# EAGLE board CT_schematic (EAGLE 7.6.0)

Size 100 x 80 mm. Coordinates in mm from the lower left corner, seen from the top.
Outline: 0,0 100,0 100,80 0,80 0,0
Copper layers (1*16): Top 0.035mm / dielectric 1.5mm / Bottom 0.035mm
Design rules "default": minimum track width 10mil, minimum drill 24mil, track to track 8mil, track to pad 8mil, pad to pad 8mil, via to via 8mil, smd to smd 8mil, copper to edge 40mil, drill to drill 8mil, minimum pad ring 10mil, minimum via ring 8mil, stop-mask expansion 4mil, vias tented up to drill 0mil, thermal gap 10mil

## Footprints (pad centres in the part's own frame; a part is rotated, then mirrored left to right if it is on the bottom)
C0603 = smd 0.8 x 0.8: 1 -0.762,0; 2 0.762,0
C0402 = smd 0.5 x 0.5: 1 -0.508,0; 2 0.508,0
C0805 = smd 1.2 x 1.3: 1 -1.016,0; 2 1.016,0
C1206 = smd 1.3 x 1.6: 1 -1.524,0; 2 1.524,0
L0603 = smd 0.8 x 0.8: 1 -0.762,0; 2 0.762,0
DR1040 = smd 1.6 x 3.2: 1 -4.458,0; 2 4.458,0
R0603 = smd 0.8 x 0.8: 1 -0.762,0; 2 0.762,0
LQFP64 = smd 0.3 x 1.2: 1 -3.75,-5.75; 2 -3.25,-5.75; 3 -2.75,-5.75; 4 -2.25,-5.75; 5 -1.75,-5.75; 6 -1.25,-5.75; 7 -0.75,-5.75; 8 -0.25,-5.75; 9 0.25,-5.75; 10 0.75,-5.75; 11 1.25,-5.75; 12 1.75,-5.75; 13 2.25,-5.75; 14 2.75,-5.75; 15 3.25,-5.75; 16 3.75,-5.75; 33 3.75,5.75; 34 3.25,5.75; 35 2.75,5.75; 36 2.25,5.75; 37 1.75,5.75; 38 1.25,5.75; 39 0.75,5.75; 40 0.25,5.75; 41 -0.25,5.75; 42 -0.75,5.75; 43 -1.25,5.75; 44 -1.75,5.75; 45 -2.25,5.75; 46 -2.75,5.75; 47 -3.25,5.75; 48 -3.75,5.75 | smd 1.2 x 0.3: 17 5.75,-3.75; 18 5.75,-3.25; 19 5.75,-2.75; 20 5.75,-2.25; 21 5.75,-1.75; 22 5.75,-1.25; 23 5.75,-0.75; 24 5.75,-0.25; 25 5.75,0.25; 26 5.75,0.75; 27 5.75,1.25; 28 5.75,1.75; 29 5.75,2.25; 30 5.75,2.75; 31 5.75,3.25; 32 5.75,3.75; 49 -5.75,3.75; 50 -5.75,3.25; 51 -5.75,2.75; 52 -5.75,2.25; 53 -5.75,1.75; 54 -5.75,1.25; 55 -5.75,0.75; 56 -5.75,0.25; 57 -5.75,-0.25; 58 -5.75,-0.75; 59 -5.75,-1.25; 60 -5.75,-1.75; 61 -5.75,-2.25; 62 -5.75,-2.75; 63 -5.75,-3.25; 64 -5.75,-3.75
TST-110-05-T-D-RA = drill 1 pad 1.7 square: 1 0,0 | drill 1 pad 1.7: 2 0,2.54; 3 2.54,0; 4 2.54,2.54; 5 5.08,0; 6 5.08,2.54; 7 7.62,0; 8 7.62,2.54; 9 10.16,0; 10 10.16,2.54; 11 12.7,0; 12 12.7,2.54; 13 15.24,0; 14 15.24,2.54; 15 17.78,0; 16 17.78,2.54; 17 20.32,0; 18 20.32,2.54; 19 22.86,0; 20 22.86,2.54
LGA-8 = smd 0.838 x 0.559: 1 -1.003,1.875; 2 -1.003,0.625; 3 -1.003,-0.625; 4 -1.003,-1.875; 5 1.003,-1.875; 6 1.003,-0.625; 7 1.003,0.625; 8 1.003,1.875
FCI_10118193-0001LF = smd 0.4 x 1.35: 1 -1.3,2.675; 2 -0.65,2.675; 3 0,2.675; 4 0.65,2.675; 5 1.3,2.675 | smd 1.6 x 1.4: 6 -3.2,2.45; 7 3.2,2.45 | smd 1.9 x 1.9: 8 -1.2,0; 9 1.2,0 | hole 0.5: -3.3,0; 3.3,0
SOT143B = smd 1 x 0.7: 1 -0.75,-1 | smd 0.6 x 0.7: 2 0.95,-1; 3 0.95,1; 4 -0.95,1
ABS07-32.768KHZ-7-T = smd 1.1 x 2.4: 1 -2.5,0; 2 0,0
ASFL1 = smd 1.7 x 1.5: 1 -1.27,-1.1; 2 1.27,-1.1; 3 1.27,1.1; 4 -1.27,1.1
TSOT-23-5 = smd 1.3 x 0.62: 1 -1.31,0.95; 2 -1.31,0; 3 -1.31,-0.95; 4 1.31,-0.95; 5 1.31,0.95
DFN8_2X3MC = smd 0.813 x 0.305: 1 -1.398,0.75; 2 -1.398,0.25; 3 -1.398,-0.25; 4 -1.398,-0.75; 5 1.398,-0.75; 6 1.398,-0.25; 7 1.398,0.25; 8 1.398,0.75 | smd 1.753 x 1.549: 9 0,0
JST-2-SMD = smd 1 x 4.6: 1 -1,-3.7; 2 1,-3.7 | smd 1.6 x 3.4: NC1 -3.4,1.5; NC2 3.4,1.5
SON-6 = smd 0.55 x 0.3: 1 -0.355,0.5 | smd 0.52 x 0.3: 2 -0.37,0; 3 -0.37,-0.5; 4 0.37,-0.5; 5 0.37,0; 6 0.37,0.5
SW_4-1437565-2 = smd 1.4 x 2.1: 1 -2.23,4.55; 2 -2.23,-4.55; 3 2.23,4.55; 4 2.23,-4.55
LGM67K-G1J2-24-Z = smd 0.8 x 1.4: A -2,0; C 0,0
NC7SZ125M5X = smd 1.3 x 0.7: 1 -1.3,0.95; 2 -1.3,0; 3 -1.3,-0.95; 4 1.3,-0.95; 5 1.3,0.95
DUMMY_PACKAGE_135 = drill 0.3: 1 0,-1; 2 1.5,-1; 3 3,-1

## Placement (x,y rotation side)
C1  1e-07  [C0603]  -22.86,54.61 0 top  (outside the outline)
C2  1e-07  [C0603]  -26.67,54.61 0 top  (outside the outline)
C3  1e-07  [C0603]  -30.48,54.61 0 top  (outside the outline)
C4  1e-07  [C0603]  -34.29,54.61 0 top  (outside the outline)
C5  4.7e-06  [C0603]  -19.05,54.61 0 top  (outside the outline)
C6  1e-07  [C0603]  -38.1,54.61 0 top  (outside the outline)
C7  1e-08  [C0603]  -41.91,54.61 0 top  (outside the outline)
C8  1e-06  [C0603]  -45.72,54.61 0 top  (outside the outline)
C9  1e-11  [C0402]  -26.67,59.69 0 top  (outside the outline)
C10  1e-11  [C0402]  -30.48,59.69 0 top  (outside the outline)
C11  1e-07  [C0402]  -34.29,59.69 0 top  (outside the outline)
C12  1e-07  [C0402]  -38.1,59.69 0 top  (outside the outline)
C13  1e-07  [C0402]  -41.91,59.69 0 top  (outside the outline)
C14  1e-05  [C0805]  -27.94,43.18 0 top  (outside the outline)
C15  1e-07  [C0402]  -45.72,59.69 0 top  (outside the outline)
C16  1e-07  [C0402]  -49.53,59.69 0 top  (outside the outline)
C17  1e-08  [C0402]  -53.34,59.69 0 top  (outside the outline)
C18  1e-05  [C0805]  -33.02,43.18 0 top  (outside the outline)
C19  1e-05  [C0805]  -38.1,43.18 0 top  (outside the outline)
C20  1e-07  [C0402]  -57.15,59.69 0 top  (outside the outline)
C21  1e-05  [C1206]  -54.61,35.56 0 top  (outside the outline)
C22  1e-05  [C1206]  -60.96,35.56 0 top  (outside the outline)
C23  1e-08  [C0402]  -60.96,59.69 0 top  (outside the outline)
C24  1e-08  [C0402]  -15.24,64.77 0 top  (outside the outline)
F1  240.0  [L0603]  -49.53,54.61 0 top  (outside the outline)
I1  3.8e-06  [DR1040]  -57.15,6.35 0 top  (outside the outline)
R2  1000.0  [R0603]  -53.34,54.61 0 top  (outside the outline)
R4  4700.0  [R0603]  -57.15,54.61 0 top  (outside the outline)
R5  2200.0  [R0603]  -60.96,54.61 0 top  (outside the outline)
R6  2200.0  [R0603]  -15.24,59.69 0 top  (outside the outline)
R7  10000.0  [R0603]  -20.32,49.53 0 top  (outside the outline)
R8  10000.0  [R0603]  -25.4,49.53 0 top  (outside the outline)
R9  10000.0  [R0603]  -30.48,49.53 0 top  (outside the outline)
R10  10000.0  [R0603]  -35.56,49.53 0 top  (outside the outline)
R11  10000.0  [R0603]  -40.64,49.53 0 top  (outside the outline)
R12  10000.0  [R0603]  -45.72,49.53 0 top  (outside the outline)
R13  10000.0  [R0603]  -50.8,49.53 0 top  (outside the outline)
R14  220000.0  [R0603]  -55.88,43.18 0 top  (outside the outline)
R15  1000000.0  [R0603]  -50.8,43.18 0 top  (outside the outline)
R16  10000.0  [R0603]  -55.88,49.53 0 top  (outside the outline)
R17  10000.0  [R0603]  -60.96,49.53 0 top  (outside the outline)
R18  9100.0  [R0603]  -19.05,59.69 0 top  (outside the outline)
R19  680000.0  [R0603]  -60.96,43.18 0 top  (outside the outline)
R20  120000.0  [R0603]  -15.24,49.53 0 top  (outside the outline)
R21  2000.0  [R0603]  -22.86,59.69 0 top  (outside the outline)
R22  10000.0  [R0603]  -15.24,54.61 0 top  (outside the outline)
U1  STM32L100RBT6A  [LQFP64]  -25.4,7.62 0 top  (outside the outline)
U2  TST-110-05-T-D-RA  [TST-110-05-T-D-RA]  -46.99,26.67 0 top  (outside the outline)
U3  MPL3115A2R1  [LGA-8]  -46.99,35.56 0 top  (outside the outline)
U4  10118193-0001LF  [FCI_10118193-0001LF]  -50.8,17.78 0 top  (outside the outline)
U5  prtr5v0u2ax  [SOT143B]  -27.94,64.77 0 top  (outside the outline)
U6  ABS07-32.768KHZ-7-T  [ABS07-32.768KHZ-7-T]  -27.94,36.83 0 top  (outside the outline)
U7  ASFL1-25MHZ-NCS  [ASFL1]  -41.91,19.05 0 top  (outside the outline)
U8  ltc3406es5  [TSOT-23-5]  -43.18,41.91 0 top  (outside the outline)
U9  MCP73831T-2ACI/MC  [DFN8_2X3MC]  -43.18,63.5 0 top  (outside the outline)
U10  S2B-PH-SM4-TB(LF)(SN)  [JST-2-SMD]  -22.86,20.32 0 top  (outside the outline)
U11  TPS3895ADRYR  [SON-6]  -36.83,63.5 0 top  (outside the outline)
U12  4-1437565-2  [SW_4-1437565-2]  -46.99,6.35 0 top  (outside the outline)
U13  Q65110A2395  [LGM67K-G1J2-24-Z]  -36.83,36.83 0 top  (outside the outline)
U14  nc7sz125m5x  [NC7SZ125M5X]  -15.24,43.18 0 top  (outside the outline)
U15  nc7sz125m5x  [NC7SZ125M5X]  -21.59,43.18 0 top  (outside the outline)
U16  Dummy  [DUMMY_PACKAGE_135]  -34.29,64.77 0 top  (outside the outline)

## Library data of the parts
C1-C24 F1 I1 R2 R4-R22 U1-U16 = circuit_tree

## Nets
CLK_CRYSTAL_U1_3: C9.1 U1.3 U6.1
CLK_CRYSTAL_U1_4: C10.1 U1.4 U6.2
CLK_U1_5: U1.5 U7.3
GND: C1.2 C2.2 C3.2 C4.2 C5.2 C6.2 C7.2 C8.2 C9.2 C10.2 C11.2 C12.2 C13.2 C14.2 C15.2 C16.2 C17.2 C18.2 C19.1 C19.2 C20.2 C21.2 C22.2 C23.2 C24.2 R2.2 R7.2 R13.2 R14.2 R18.2 R20.2 R21.2 U1.12 U1.18 U1.31 U1.47 U1.63 U2.4 U2.6 U2.8 U2.10 U2.12 U2.14 U2.16 U2.18 U2.20 U3.3 U4.5 U4.6 U4.7 U4.8 U4.9 U5.1 U7.2 U8.2 U9.6 U9.9 U10.2 U11.2 U13.C U14.2 U14.3 U15.1 U15.3 U16.1
INPUT_USBPOWER_5V: C21.1 R22.2 U4.1 U5.4 U9.1 U9.2
NET_U1_1: C6.1 U1.1
NET_U1_7: R4.1 U1.7 U15.4
NET_U1_13: C7.1 C8.1 F1.1 U1.13
NET_U1_58: R5.1 U1.58 U3.8
NET_U1_59: R6.1 U1.59 U3.7
NET_U1_60: R7.1 U1.60
NET_U1_61: U13.A
NET_U1_62: U12.3 U12.4
NET_U2_19: R13.1 U2.19
NET_U3_2: C16.1 U3.2
NET_U8_1: U8.1
NET_U8_3: I1.1 U8.3
NET_U8_5: R14.1 R15.1 U8.5
NET_U8_ATNET_3: I1.2 R15.2
NET_U9_5: R22.1 U9.5
NET_U9_8: R21.1 U9.8
NET_U11_1: R17.1 R18.1 U11.1
NET_U11_3: R19.2 R20.1 U11.3
NET_U11_4: R16.1 U11.4 U14.4 U15.2
NET_U12_1: R2.1 U12.1 U12.2
PROC_ADC_IN13: U1.11 U16.3
PROC_ADC_IN20: U1.35 U16.2
PROC_SYS_JTCK_SWCLK: R11.1 U1.49 U2.9
PROC_SYS_JTDI: R9.1 U1.50 U2.5
PROC_SYS_JTDO_TRACESWO: U1.55 U2.13
PROC_SYS_JTMS_SWDIO: R10.1 U1.46 U2.7
PROC_SYS_JTRST: R8.1 U1.56 U2.3
PROC_USB_DM: U1.44 U4.2 U5.3
PROC_USB_DP: U1.45 U4.3 U5.2
RST_OUT_U2_SRESET_B: R12.1 U2.15 U14.1
VCC_S1_3V7: C18.1 C22.1 U8.4 U9.3 U9.4 U10.1
VCC_TIER1_3V3: C1.1 C2.1 C3.1 C4.1 C5.1 C11.1 C12.1 C13.1 C14.1 C15.1 C17.1 C19.2 C20.1 C23.1 C24.1 F1.2 I1.2 R4.2 R5.2 R6.2 R8.2 R9.2 R10.2 R11.2 R12.2 R15.2 R16.2 R17.2 R19.1 U1.19 U1.32 U1.48 U1.64 U2.1 U2.2 U3.1 U3.4 U7.4 U11.6 U14.5 U15.5

## Tracks (layer width: path | path; a pad name or v marks a point on that pad's centre or on a via)
CLK_CRYSTAL_U1_3  (2 unrouted)
CLK_CRYSTAL_U1_4  (2 unrouted)
CLK_U1_5  (1 unrouted)
GND  (64 unrouted)
INPUT_USBPOWER_5V  (5 unrouted)
NET_U1_1  (1 unrouted)
NET_U1_7  (2 unrouted)
NET_U1_13  (3 unrouted)
NET_U1_58  (2 unrouted)
NET_U1_59  (2 unrouted)
NET_U1_60  (1 unrouted)
NET_U1_62  (1 unrouted)
NET_U2_19  (1 unrouted)
NET_U3_2  (1 unrouted)
NET_U8_3  (1 unrouted)
NET_U8_5  (2 unrouted)
NET_U8_ATNET_3  (1 unrouted)
NET_U9_5  (1 unrouted)
NET_U9_8  (1 unrouted)
NET_U11_1  (2 unrouted)
NET_U11_3  (2 unrouted)
NET_U11_4  (3 unrouted)
NET_U12_1  (2 unrouted)
PROC_ADC_IN13  (1 unrouted)
PROC_ADC_IN20  (1 unrouted)
PROC_SYS_JTCK_SWCLK  (2 unrouted)
PROC_SYS_JTDI  (2 unrouted)
PROC_SYS_JTDO_TRACESWO  (1 unrouted)
PROC_SYS_JTMS_SWDIO  (2 unrouted)
PROC_SYS_JTRST  (2 unrouted)
PROC_USB_DM  (2 unrouted)
PROC_USB_DP  (2 unrouted)
RST_OUT_U2_SRESET_B  (2 unrouted)
VCC_S1_3V7  (5 unrouted)
VCC_TIER1_3V3  (40 unrouted)